# Altium PCB final_pcb.PcbDoc (part 1 of 2)
Units mm, origin at the board's own origin, x right, y up, seen from the top; angles counter-clockwise.
Board outline 94.61 x 73.28 mm, 4 copper layers (Top Layer, Mid Layer 1, Mid Layer 2, Bottom Layer), stack 1.57 mm thick; 50 components, 37 nets, 197 pads, 62 vias.
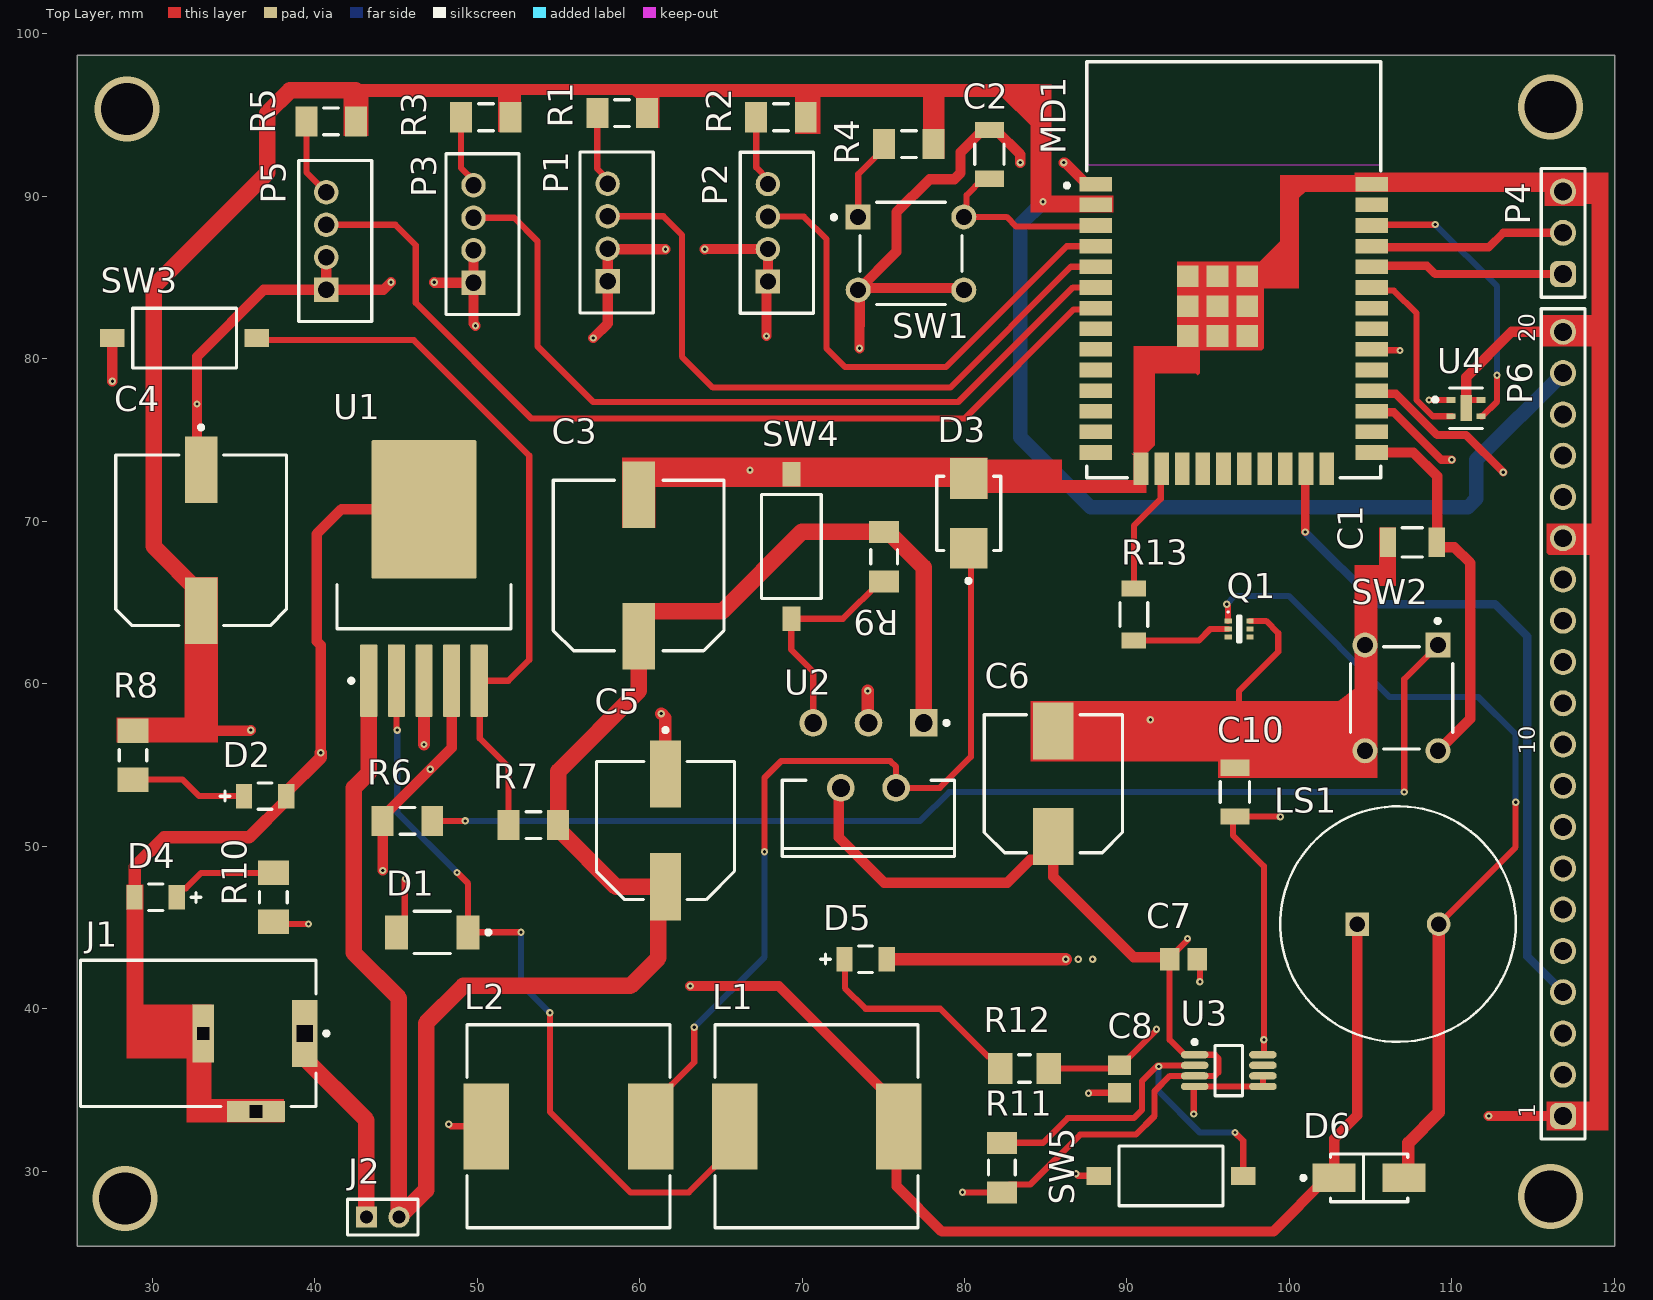
[diagram p0: Top Layer view]
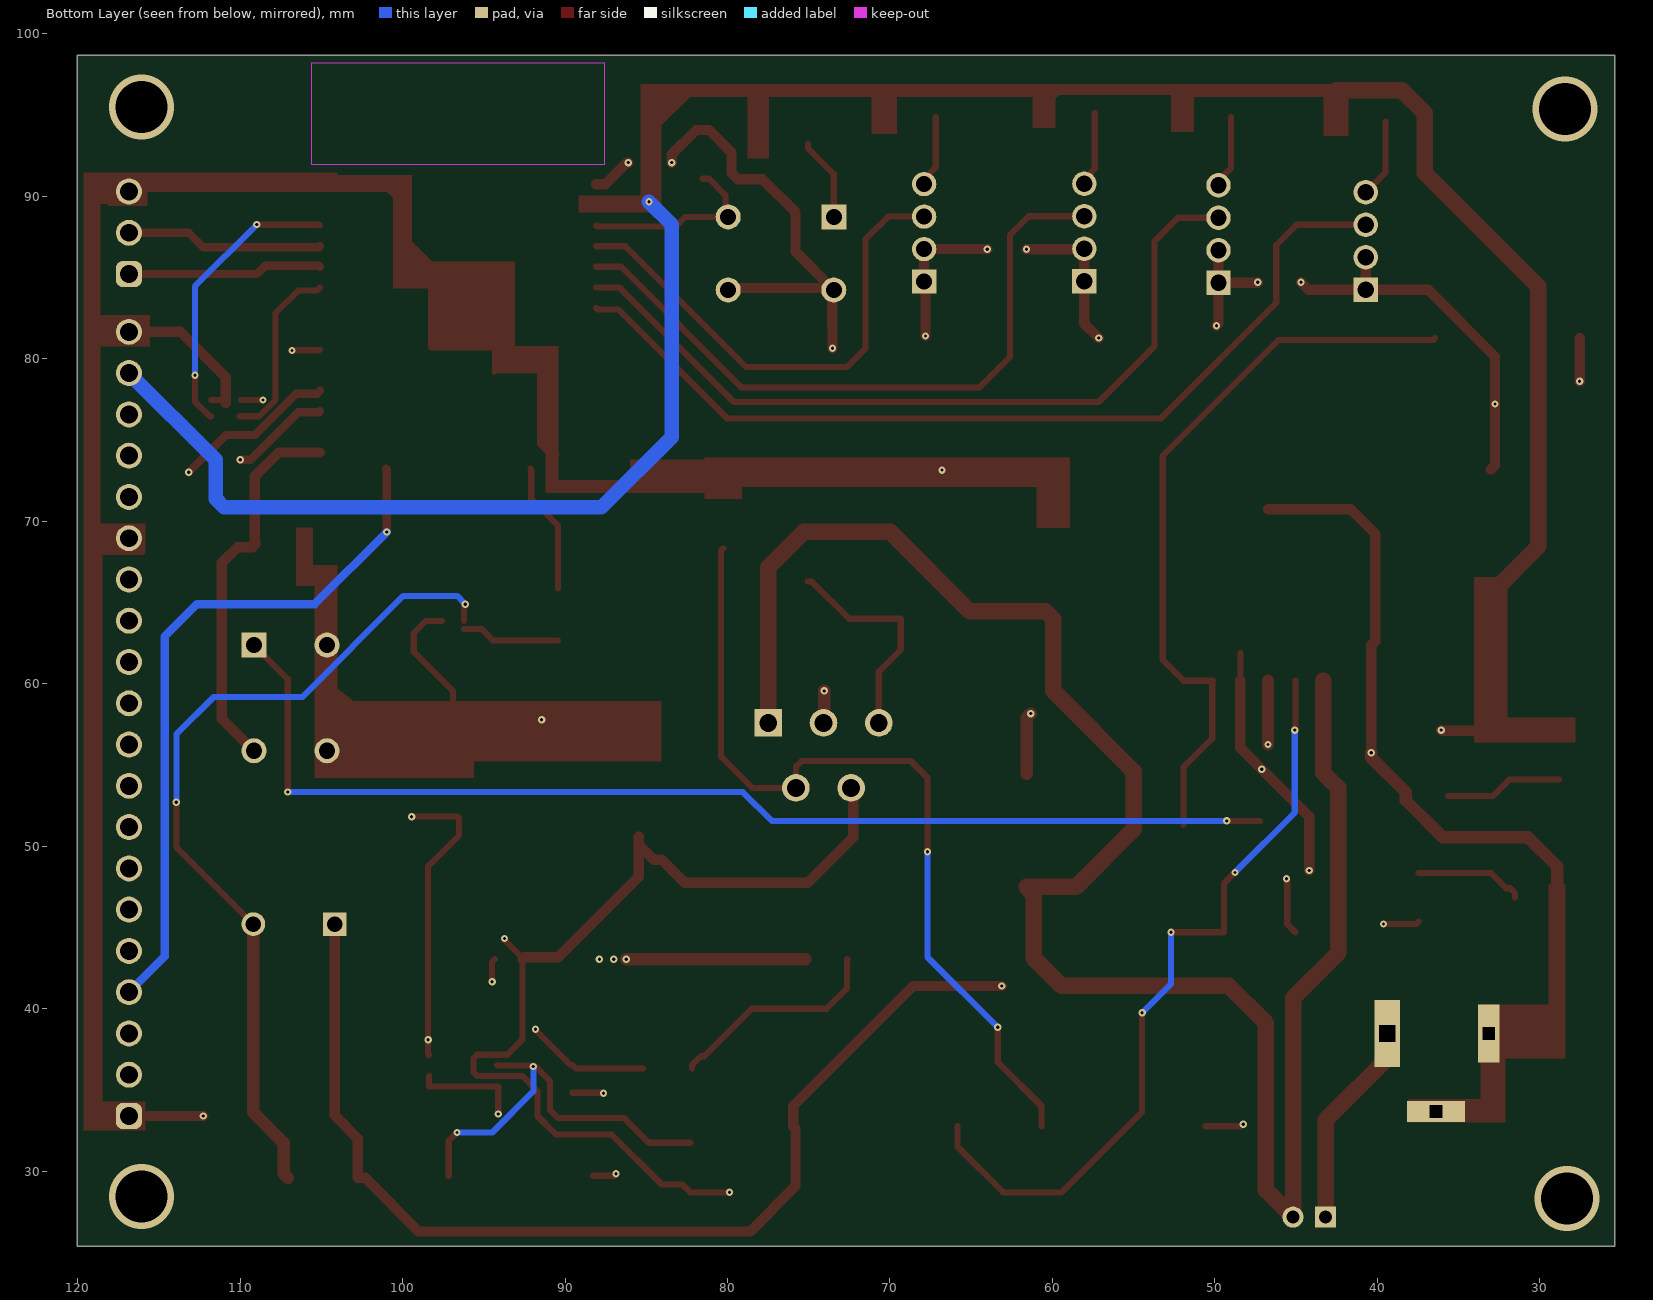
[diagram p1: Bottom Layer view, seen from below]
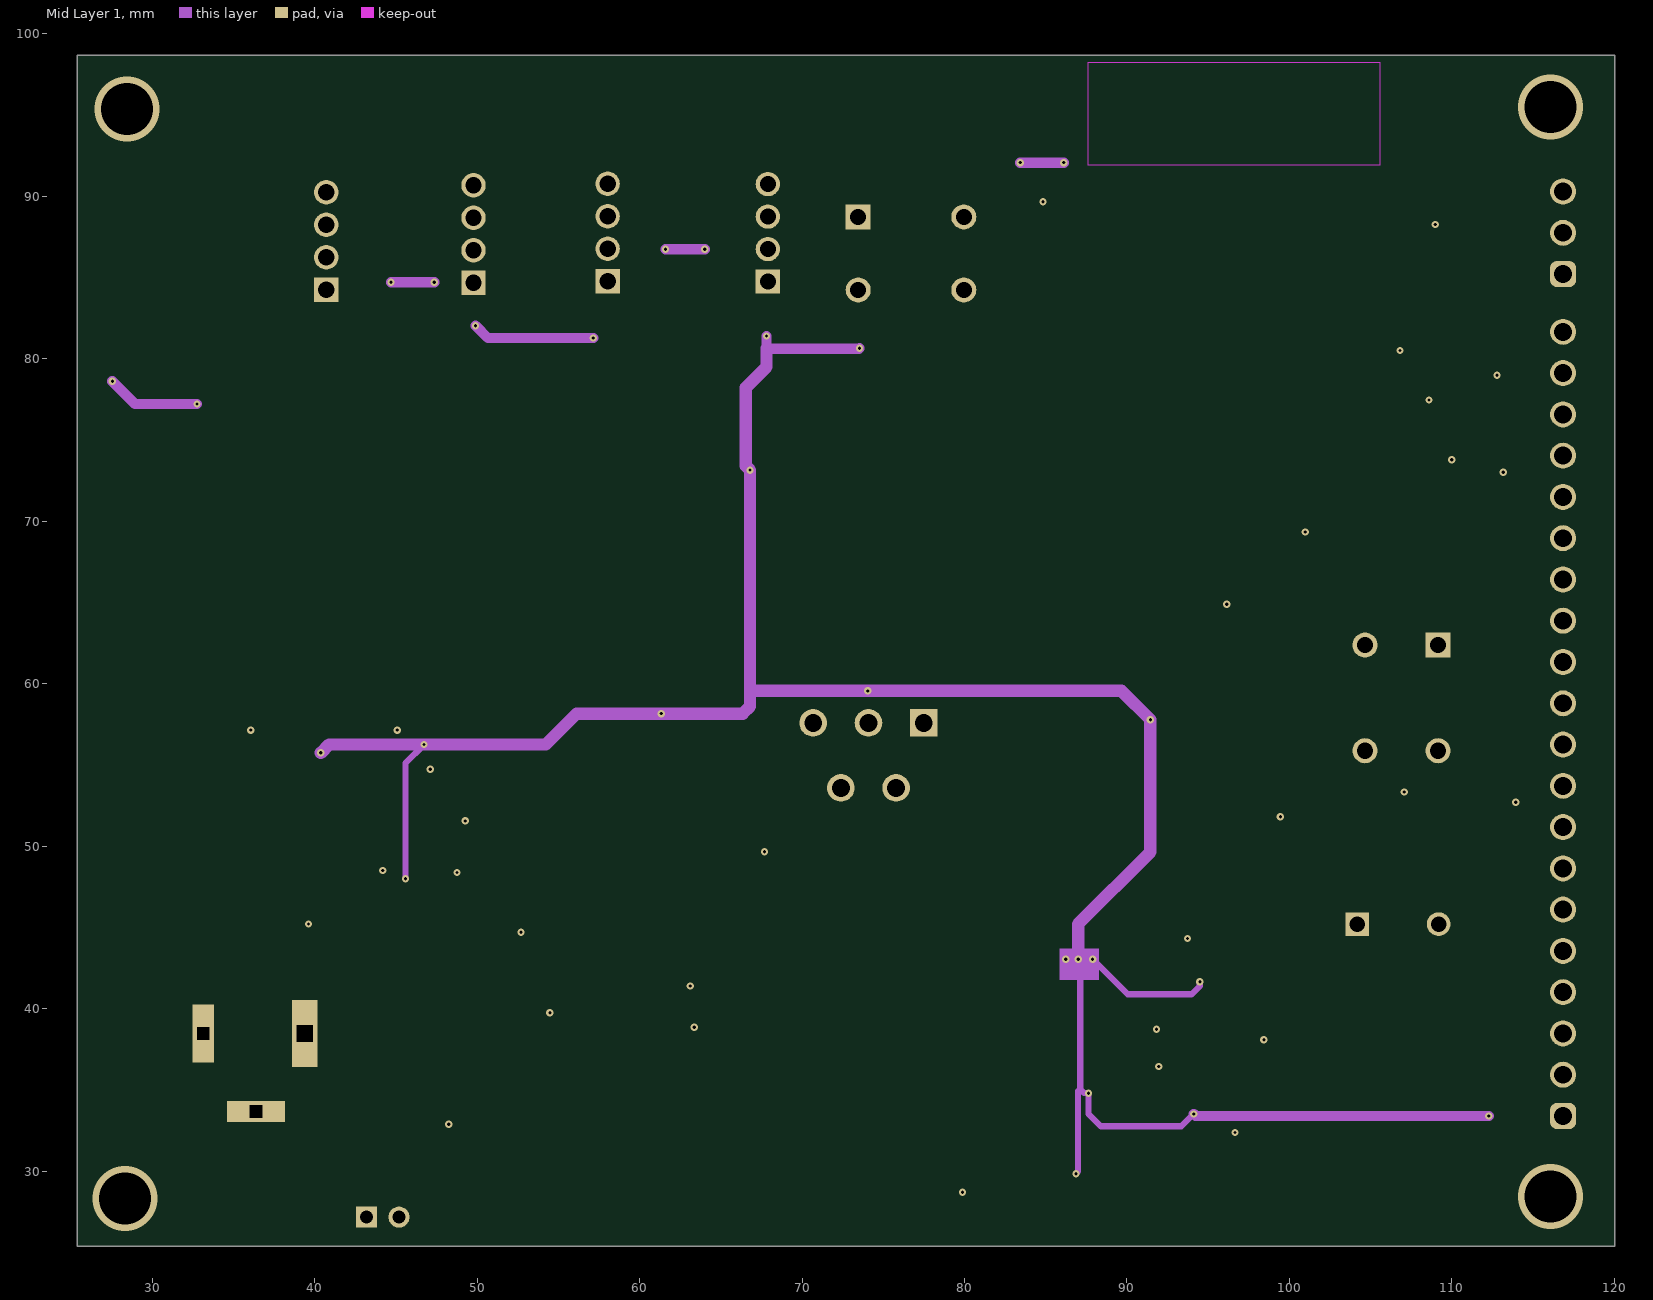
[diagram p2: Mid Layer 1]
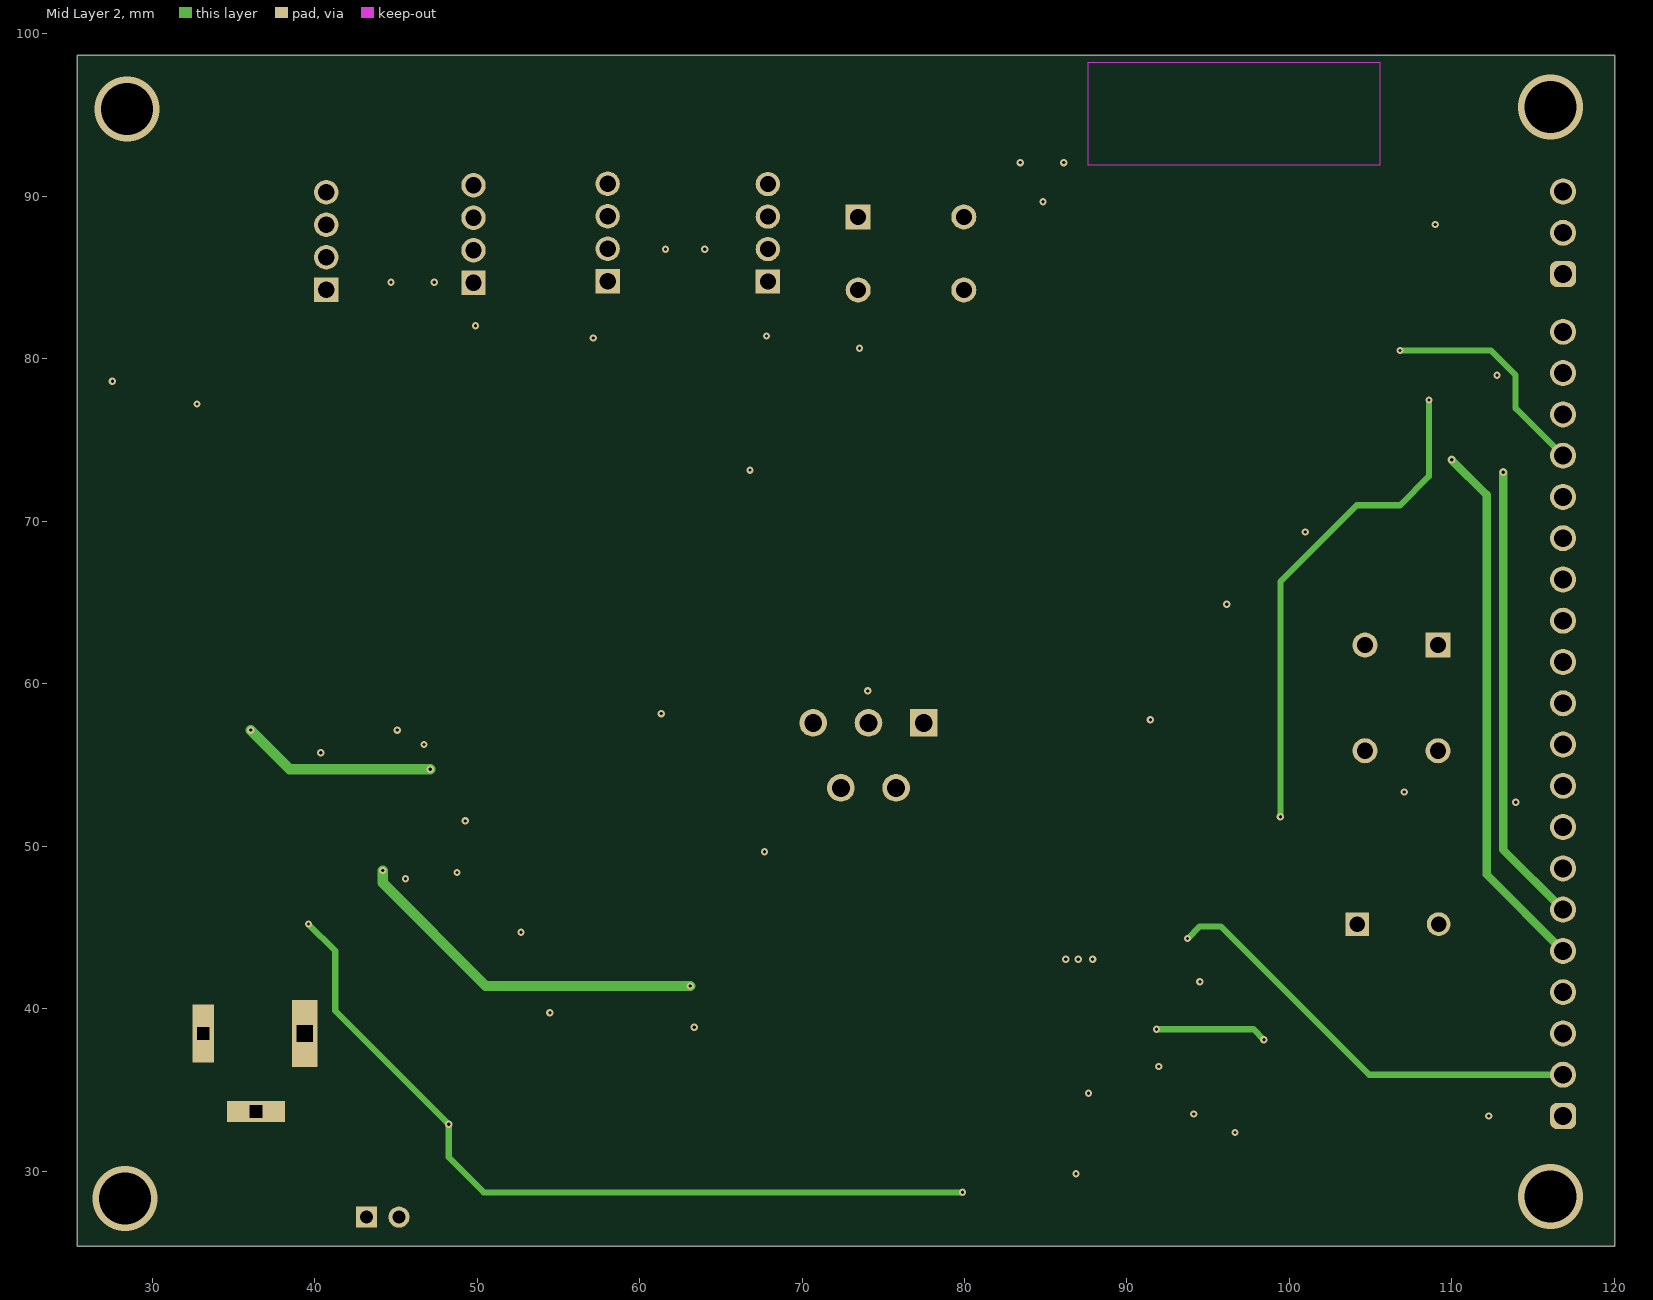
[diagram p3: Mid Layer 2]
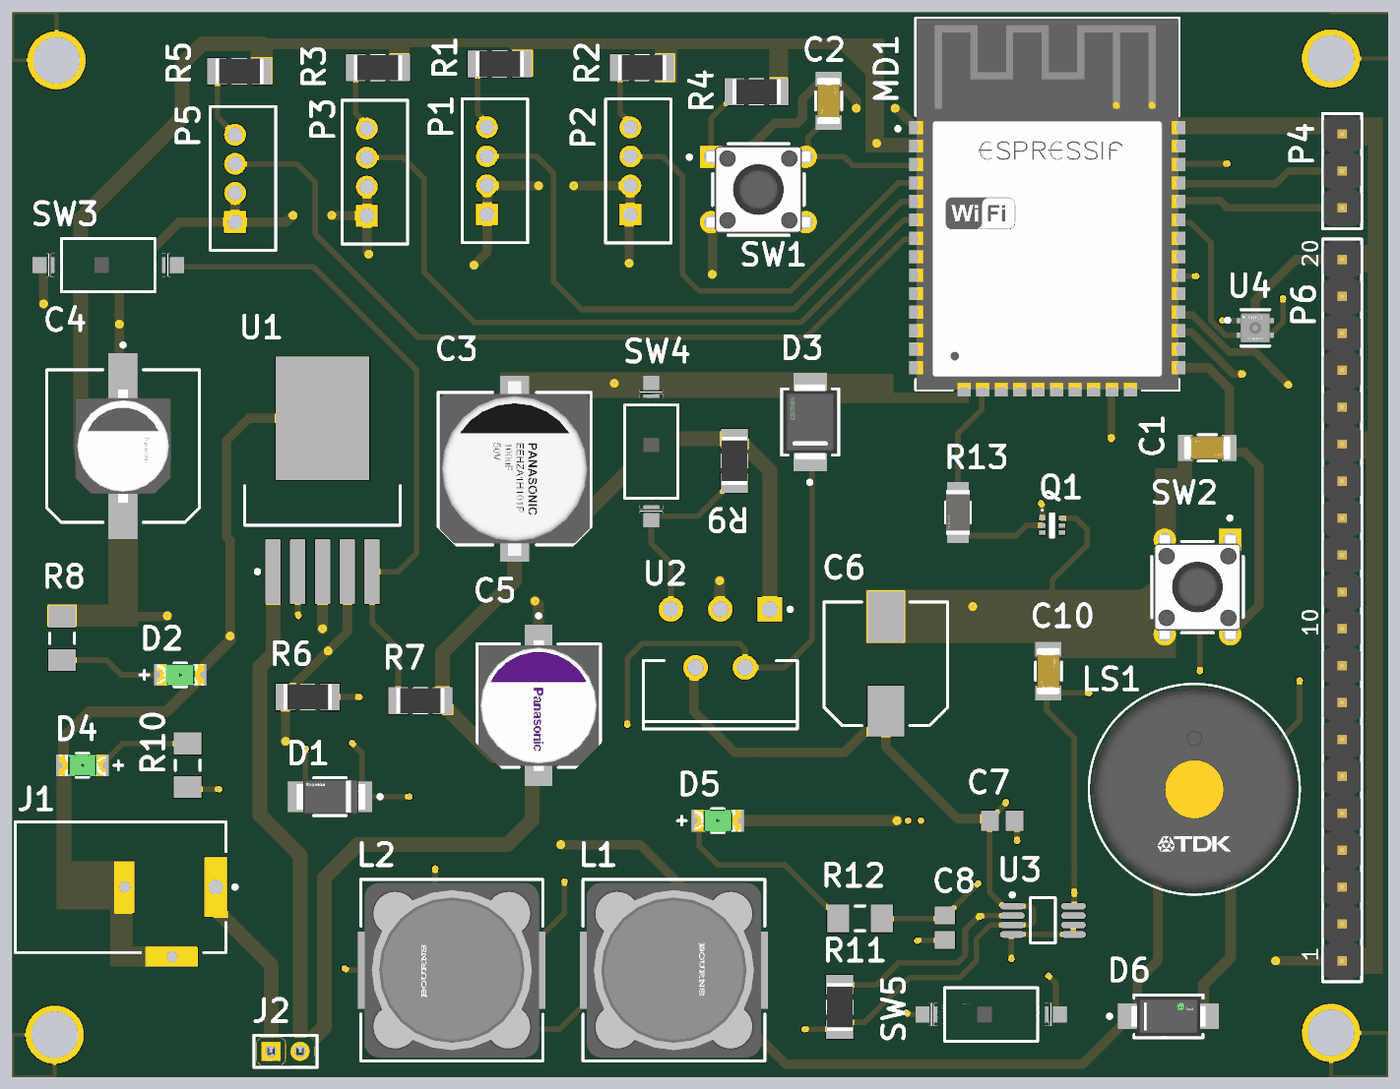
[diagram p4: 3D render of the assembled board from above, using the file's embedded part models]

## Layer stack, top to bottom
Top Solder: solder mask 0.0127, Solder Resist, Dk 3.8
Top Layer: signal copper 0.035
Dielectric 1: prepreg 0.1, 2313, Dk 4.05
Mid Layer 1: signal copper 0.0175
Core: core 1.265, FR-4, Dk 4.5
Mid Layer 2: signal copper 0.0175
Dielectric 2: prepreg 0.1, 2313, Dk 4.05
Bottom Layer: signal copper 0.035
Bottom Solder: solder mask 0.0127, Solder Resist, Dk 3.8

## Board outline
25.4,25.4 120.015,25.4 120.015,98.679 25.4,98.679

## Design rules (kind name [scope] priority, off if disabled: settings)
BoardOutlineClearance [All] p1: gap=0.2 ignorepadtopadclearanceinfootprint=FALSE
Clearance [All] p1: gap=0.102 ignorepadtopadclearanceinfootprint=FALSE except(0.127: Arc-Via Track-Via SMDPad-Via THPad-Via Via-Via Via-Fill Via-Poly Via-Region Via-Text; 0.25: Arc-Hole Track-Hole SMDPad-Hole THPad-Hole Via-Hole Fill-Hole Poly-Hole Region-Hole Text-Hole)
ComponentClearance [All] p1: gap=0.102 collisioncheckmode=3 verticalgap=0.102 showdistances=TRUE
DiffPairsRouting [All] p1: maxlimit=0.102 minlimit=0.102 mostfreqgap=0.102 toplayer_minwidth=0.102 toplayer_maxwidth=1816.048 toplayer_prefwidth=0.102 midlayer1_minwidth=0.102 midlayer1_maxwidth=1816.048 midlayer1_prefwidth=0.102 midlayer2_minwidth=0.102 midlayer2_maxwidth=1816.048 midlayer2_prefwidth=0.102 bottomlayer_minwidth=0.102 bottomlayer_maxwidth=1816.048 bottomlayer_prefwidth=0.102 maxuncoupledlength=12.7
Height [All] p1: minheight=0 maxheight=1816.048 prefheight=12.7
HoleSize [All] p1: absolutevalues=TRUE maxlimit=6.3 minlimit=0.2 maxpercent=80.000 minpercent=20.000
HoleToHoleClearance [All] p1: gap=0.25 allowstackedmicrovias=FALSE
MinimumAnnularRing [All] p1: minimumring=0.076
MinimumSolderMaskSliver [All] p1: minsoldermaskwidth=0
PlaneClearance [All] p1: clearance=0.102
PlaneConnect PlaneConnectPowerPads [InPadClass('PowerPads')] p1: planeconnectstyle=Direct reliefexpansion=0.508 reliefentries=4 reliefconductorwidth=0.254 reliefairgap=0.254
PlaneConnect [All] p2: pad.planeconnectstyle=Relief pad.reliefexpansion=0.3 pad.reliefentries=4 pad.reliefconductorwidth=0.102 pad.reliefairgap=0.102 via.planeconnectstyle=Direct via.reliefexpansion=0.3 via.reliefentries=4 via.reliefconductorwidth=0.127 via.reliefairgap=0.127
PolygonConnect PolygonConnectPowerPads [All vs (InPadClass('PowerPads'))] p1: connectstyle=Direct reliefconductorwidth=0.254 reliefentries=4 polygonreliefangle="90 Angle" airgapwidth=0.254
PolygonConnect [All] p2: thpad.connectstyle=Relief thpad.reliefconductorwidth=0.102 thpad.reliefentries=4 thpad.polygonreliefangle="90 Angle" thpad.airgapwidth=0.102 smdpad.connectstyle=Relief smdpad.reliefconductorwidth=0.102 smdpad.reliefentries=4 smdpad.polygonreliefangle="90 Angle" smdpad.airgapwidth=0.102 via.connectstyle=Direct via.reliefconductorwidth=0.127 via.reliefentries=4 via.polygonreliefangle="90 Angle" via.airgapwidth=0.127
RoutingVias [All] p1: holewidth=0.2 width=0.45 viastyle="Through Hole" minholewidth=0.2 minwidth=0.45 maxholewidth=6.3 maxwidth=6.55
SilkToSilkClearance [All] p1: silktosilkclearance=0
SilkToSolderMaskClearance [IsPad] p1: minsilkscreentomaskgap=0.102 clearancetoexposedcopper=TRUE
SolderMaskExpansion [All] p1: expansion=0.075 istentingtop=FALSE
Width [All] p1: maxlimit=1816.048 minlimit=0.102 preferedwidth=0.102
20 further rules are at their usual default settings.

## Classes and differential pairs
component class U_Sensors_Actuators: C10 D6 LS1 P6 Q1 R13 U4
component class U_powerSupply: C3 C4 C5 C6 C7 C8 D1 D2 D3 D4 D5 J1 J2 L1 L2 R7 R8 R9 R10 R11 R12 SW3 SW4 SW5 U1 U2 U3
component class U_microcontroller: C1 C2 MD1 P1 P2 P3 P4 P5 R1 R2 R3 R4 R5 R6 SW1 SW2

## Components (designator, comment, footprint, x,y, rotation, side; value= is the part's Value field where it differs from the comment)
C1 "CC1206KRX7R9BB104" FP-CC1206-1_25-MFG 107.569,68.707 r180 top value="100 nF"
C2 "CC1206KRX7R9BB104" FP-CC1206-1_25-MFG 81.534,92.583 r90 top value="100 nF"
C3 "EEHZA1H101P" FP-ZAG-MFG 59.944,67.278 r270 top value=470uF
C4 "EEEFK1V331AP" FP-FKG-MFG 33.02,68.834 r270 top
C5 "470uF" FP-OS-CON-SMT-E7-MFG 61.595,50.973 r270 top
C6 "220uF" NIC-CAPA2-8X10_V 85.471,53.848 r90 top
C7 "GRM21BF51C106ZE15L" CAPC2013X135X45NL10T25 93.472,43.053 r180 top
C8 "GRM21BF51C106ZE15L" CAPC2013X135X45NL10T25 89.535,35.687 r90 top
C10 "CC1206KRX7R9BB104" FP-CC1206-1_25-MFG 96.647,53.34 r90 top value="100 nF"
D1 "CMS06(TE12L,Q,M)" FP-M-FLAT-MFG 47.244,44.704 r0 top
D2 "SML-LX1206GC-TR" FP-SML-LX1206GC-TR-MFG 36.957,53.086 r0 top
D3 "B240-13-F" FP-SMB-MFG 80.264,70.485 r90 top value=200pF
D4 "SML-LX1206GC-TR" FP-SML-LX1206GC-TR-MFG 30.226,46.863 r180 top
D5 "SML-LX1206OW-TR" FP-SML-LX1206GC-TR-MFG 73.914,43.053 r0 top
D6 "RS1M" FP-403AE-MFG 104.902,29.591 r0 top value=10pF
J1 "RAPC722X" SWITCH-RAPC712X-3_V 36.272,38.481 r270 top
J2 "M22-2510205" FP-M22-2510205-MFG 44.196,27.178 r0 top
L1 "SRR1210-101M" FP-SRR1210-MFG 70.896,32.766 r0 top
L2 "SRR1210-680M" FP-SRR1210-MFG 55.626,32.766 r180 top value=68uH
LS1 "PS1440P02BT" FP-PS1440P02BT-MFG 106.68,45.212 r0 top
MD1 "ESP32-WROOM-32D" FP-ESP32-WROOM-32D-MFG 96.574,85.482 r0 top
P1 "B4B-PH-K-S(LF)(SN)" JST-B4B-PH-K-S_V 58.589,87.773 r90 top
P2 "B4B-PH-K-S(LF)(SN)" JST-B4B-PH-K-S_V 68.453,87.757 r90 top
P3 "B4B-PH-K-S(LF)(SN)" JST-B4B-PH-K-S_V 50.334,87.678 r90 top
P4 "Program Header" 61300311121 116.84,87.757 r90 top
P5 "B4B-PH-K-S(LF)(SN)" JST-B4B-PH-K-S_V 41.275,87.249 r90 top
P6 "61302011121" 61302011121 116.84,57.531 r90 top
Q1 "BC847CDXV6T1G" ONSC-SOT-563-6-463A-01_V 96.901,63.373 r0 top
R1 "CRCW12061K00FKEA" RESC3216X60X45ML15T20 58.928,95.123 r0 top
R2 "CRCW12061K00FKEA" RESC3216X60X45ML15T20 68.707,94.869 r0 top
R3 "CRCW12061K00FKEA" RESC3216X60X45ML15T20 50.547,94.869 r0 top
R4 "CRCW12061K00FKEA" RESC3216X60X45ML15T20 76.58,93.218 r0 top
R5 "CRCW12061K00FKEA" RESC3216X60X45ML15T20 41.021,94.615 r0 top
R6 "CRCW12061K00FKEA" RESC3216X60X45ML15T20 45.72,51.562 r180 top
R7 "CRCW12061K00FKEA" RESC3216X60X45ML15T20 53.468,51.308 r0 top
R8 "2K" RESC3216X70X50ML20T25 28.829,55.602 r90 top
R9 "CRCW12061K00FKEA" RESC3216X60X45ML15T20 75.057,67.818 r90 top
R10 "3K" RESC3216X70X50ML20T25 37.465,46.863 r270 top
R11 "CRCW12061K00FKEA" RESC3216X60X45ML15T20 82.296,30.226 r270 top
R12 "2K" RESC3216X70X50ML20T25 83.693,36.322 r0 top
R13 "AC1206JR-07220RL" FP-AC1206-MFG 90.424,64.262 r270 top value=220Ω
SW1 "3-1825910-1" FP-3-1825910-1-MFG 76.708,86.487 r0 top
SW2 "3-1825910-1" FP-3-1825910-1-MFG 106.898,59.13 r270 top
SW3 "A6S-1104-H" FP-A6S-1104-H-MFG 32.004,81.28 r90 top
SW4 "A6S-1104-H" FP-A6S-1104-H-MFG 69.342,68.453 r0 top
SW5 "A6S-1104-H" FP-A6S-1104-H-MFG 92.71,29.718 r90 top
U1 "LM2596S-3.3/NOPB" KTT0005B_M 46.736,66.489 r90 top
U2 "LM2596T-5/NOPB" NDH0005A 74.09,55.594 r180 top
U3 "LP2966IMM-1833/NOPB" MUA08A_N 96.266,36.195 r0 top
U4 "SHTC1" FP-SHTC1-MFG 110.871,76.962 r270 top

## Footprints (in the part's own frame and the unit in brackets; to place one, negate y for a bottom-side part, rotate by r counter-clockwise, add the part's x,y. Pads: shape width x height; smd on the part's side, far side on the other; paste and mask are expansions set on the pad)
61300311121 [mm] "Pin Header, pitch 2.54 mm, THT, Vertical, single row, 3p"
  rrect50% 1.6x1.6 hole 1.1: 1(-2.54,0)
  round 1.6 hole 1.1: 2(0,0) 3(2.54,0)
  silkscreen extent -3.96,-1.35 3.96,1.35, body extent -3.81,-1.27 3.81,1.27, height 8.57
61302011121 [mm] "Pin Header, pitch 2.54 mm, THT, Vertical, single row, 20p"
  rrect50% 1.6x1.6 hole 1.1: 1(-24.13,0)
  round 1.6 hole 1.1: 2(-21.59,0) 3(-19.05,0) 4(-16.51,0) 5(-13.97,0) 6(-11.43,0) 7(-8.89,0) 8(-6.35,0) 9(-3.81,0) 10(-1.27,0) 11(1.27,0) 12(3.81,0) 13(6.35,0) 14(8.89,0) 15(11.43,0) 16(13.97,0) 17(16.51,0) 18(19.05,0) 19(21.59,0) 20(24.13,0)
  silkscreen extent -25.55,-1.35 25.55,1.35, body extent -25.4,-1.27 25.4,1.27, height 8.57
CAPC2013X135X45NL10T25 [mm] "Chip Capacitor, 2-Leads, Body 2.00x1.25mm, IPC Medium Density"
  rect 1.2x1.4 smd: 1(-0.85,0) 2(0.85,0)
  body extent -1.05,-0.67 1.05,0.67, height 1.35
FP-3-1825910-1-MFG [mm]
  rect 1.54x1.54 hole 0.99 paste-2539.97 mask+0: 1(-3.25,2.25)
  round 1.54 hole 0.99 paste-2539.97 mask+0: 2(3.25,2.25) 3(-3.25,-2.25) 4(3.25,-2.25)
  silkscreen extent -4.87,-3.15 3.15,3.15, body extent -4.12,-3.24 4.12,3.24, height 0.25
FP-403AE-MFG [mm]
  rect 2.65x1.75 smd paste+0 mask+0: 1(-2.15,0) 2(2.15,0)
  silkscreen extent -4.17,-1.48 2.37,1.48, body extent -3.57,-1.58 3.57,1.58, height 0.25
FP-A6S-1104-H-MFG [mm]
  rect 1.1x1.5 smd paste+0 mask+0: 1(0,-4.45) 2(0,4.45)
  silkscreen extent -1.84,-3.2 1.84,3.2, body extent -1.94,-5.3 1.94,5.3, height 0.25
FP-AC1206-MFG [mm]
  rect 1x1.5 smd paste+0 mask+0: 1(-1.6,0) 2(1.6,0)
  silkscreen extent -0.72,-0.85 0.72,0.85, body extent -2.2,-0.95 2.2,0.95, height 0.25
FP-CC1206-1_25-MFG [mm]
  rect 1x1.8 smd paste+0 mask+0: 1(-1.5,0) 2(1.5,0)
  silkscreen extent -0.63,-0.9 0.63,0.9, body extent -2.2,-1.25 2.2,1.25, height 0.25
FP-ESP32-WROOM-32D-MFG [mm]
  rect 2x0.9 smd paste+0 mask+0: 1(-8.5,5.26) 2(-8.5,3.99) 3(-8.5,2.72) 4(-8.5,1.45) 5(-8.5,0.18) 6(-8.5,-1.09) 7(-8.5,-2.36) 8(-8.5,-3.63) 9(-8.5,-4.9) 10(-8.5,-6.17) 11(-8.5,-7.44) 12(-8.5,-8.71) 13(-8.5,-9.98) 14(-8.5,-11.25) 25(8.5,-11.25) 26(8.5,-9.98) 27(8.5,-8.71) 28(8.5,-7.44) 29(8.5,-6.17) 30(8.5,-4.9) 31(8.5,-3.63) 32(8.5,-2.36) 33(8.5,-1.09) 34(8.5,0.18) 35(8.5,1.45) 36(8.5,2.72) 37(8.5,3.99) 38(8.5,5.26)
  rect 0.9x2 smd paste+0 mask+0: 15(-5.715,-12.25) 16(-4.445,-12.25) 17(-3.175,-12.25) 18(-1.905,-12.25) 19(-0.635,-12.25) 20(0.635,-12.25) 21(1.905,-12.25) 22(3.175,-12.25) 23(4.445,-12.25) 24(5.715,-12.25)
  rect 1.33x1.33 smd paste+0 mask+0: 39(-2.835,-4.075) 39(-2.835,-2.24) 39(-2.835,-0.405) 39(-1,-4.075) 39(-1,-2.24) 39(-1,-0.405) 39(0.835,-4.075) 39(0.835,-2.24) 39(0.835,-0.405)
  Keep-Out Layer region: -9,6.45 9,6.45 9,12.75 -9,12.75
  Keep-Out Layer region: -9,6.45 9,6.45 9,12.75 -9,12.75
  silkscreen extent -10.4,-12.8 9.05,12.8, body extent -9.6,-13.35 9.6,12.9, height 0.25
FP-FKG-MFG [mm]
  rect 4.1x2 smd paste+0 mask+0: 1(-4.35,0) 2(4.35,0)
  silkscreen extent -7.07,-5.25 5.25,5.25, body extent -6.65,-5.5 6.65,5.5, height 0.25
FP-M22-2510205-MFG [mm]
  rect 1.3x1.3 hole 0.8 paste-2539.97 mask+0: 1(-1,0)
  round 1.3 hole 0.8 paste-2539.97 mask+0: 2(1,0)
  silkscreen extent -2.17,-1.1 2.17,1.1, body extent -2.27,-1.2 2.27,1.2, height 0.25
FP-M-FLAT-MFG [mm]
  rect 1.4x2.1 smd paste+0 mask+0: 1(-2.2,0) 2(2.2,0)
  silkscreen extent -1.12,-1.3 3.58,1.3, body extent -3,-1.4 3,1.4, height 0.25
FP-OS-CON-SMT-E7-MFG [mm]
  rect 4.15x1.9 smd paste+0 mask+0: 1(-3.475,0) 2(3.475,0)
  silkscreen extent -6.3,-4.25 4.25,4.25, body extent -5.8,-4.5 5.8,4.5, height 0.25
FP-PS1440P02BT-MFG [mm]
  rect 1.45x1.45 hole 0.95 paste-2539.97 mask+0: 1(-2.5,0)
  round 1.45 hole 0.95 paste-2539.97 mask+0: 2(2.5,0)
  silkscreen extent -7.25,-7.25 7.25,7.25, body extent -7.35,-7.35 7.35,7.35, height 0.25
FP-SHTC1-MFG [mm]
  rect 0.35x0.55 smd paste-1000 mask-1000: 1(-0.5,-0.925) 2(0.5,-0.925) 3(0.5,0.925) 4(-0.5,0.925)
  rect 1.6x0.7 smd paste-1000 mask+0: 5(0,0)
  silkscreen extent -1.25,-2.02 1.25,1, body extent -1.1,-1.4 1.1,1.4, height 0.25
FP-SMB-MFG [mm]
  rect 2.5x2.3 smd paste+0 mask+0: 1(-2.15,0) 2(2.15,0)
  silkscreen extent -4.27,-1.97 2.28,1.97, body extent -3.5,-2.07 3.5,2.07, height 0.25
FP-SML-LX1206GC-TR-MFG [mm]
  rect 1x1.5 smd paste+0 mask+0: 1(-1.3,0) 2(1.3,0)
  silkscreen extent -2.78,-0.81 0.43,0.81, body extent -1.9,-0.91 1.9,0.91, height 0.25
FP-SRR1210-MFG [mm]
  rect 2.8x5.3 smd paste+0 mask+0: 1(-5.05,0) 2(5.05,0)
  silkscreen extent -6.25,-6.25 6.25,6.25, body extent -6.55,-6.35 6.55,6.35, height 0.25
FP-ZAG-MFG [mm]
  rect 4.1x2 smd paste+0 mask+0: 1(-4.35,0) 2(4.35,0)
  silkscreen extent -5.25,-5.25 5.25,5.25, body extent -6.65,-5.5 6.65,5.5, height 0.25
JST-B4B-PH-K-S_V [mm] "Connector, 4-Leads, Body 9.9x4.5mm, Pitch 2mm"
  rect 1.5x1.5 hole 1: 1(-3,0.55)
  round 1.5 hole 1: 2(-1,0.55) 3(1,0.55) 4(3,0.55)
  silkscreen extent -4.95,-2.25 4.95,2.25, body extent -4.95,-2.25 4.95,2.25, height 6
KTT0005B_M [mm] "DPAK, 5-Leads, Body 10.65x9.65mm, Pitch 1.7mm, IPC Low Density"
  rrect10% 4.45x1.05 smd: 1(-6.3,3.4) 2(-6.3,1.7) 3(-6.3,0) 4(-6.3,-1.7) 5(-6.3,-3.4)
  rrect2% 8.5x6.45 smd: 6(4.25,0)
  silkscreen extent -6.42,-5.35 -0.4,5.35, body extent -3.1,-5.32 6.55,5.33, height 4.83
MUA08A_N [mm] "TSOP, 8-Leads, Body 3x3mm, Pitch 0.65mm, IPC Medium Density"
  oval 1.7x0.45 smd: 1(-2.1,0.975) 2(-2.1,0.325) 3(-2.1,-0.325) 4(-2.1,-0.975) 5(2.1,-0.975) 6(2.1,-0.325) 7(2.1,0.325) 8(2.1,0.975)
  silkscreen extent -2.22,-1.55 0.85,1.87, body extent -1.55,-1.55 1.55,1.55, height 1.09
NDH0005A [mm] "FM, 5-Leads, Body 10.6x4.7mm, Pitch 1.7mm"
  rect 1.7x1.7 hole 1.1: 1(-3.4,-2)
  round 1.7 hole 1.1: 2(-1.7,2) 3(0,-2) 4(1.7,2) 5(3.4,-2)
  silkscreen extent -5.3,-2.12 5.3,6.23, body extent -5.35,-2.31 5.35,6.28, height 21.1
NIC-CAPA2-8X10_V [mm] "Aluminum Electrolytic Capacitor, Diameter 8mm, Height 10.8mm, Pitch 6.5mm"
  rect 3.5x2.5 smd: 1(-3.25,0) 2(3.25,0)
  silkscreen extent -4.25,-4.25 4.25,4.25, body extent -3.99,-3.97 3.99,4, height 10.8
ONSC-SOT-563-6-463A-01_V [mm] "SOT23, 6-Leads, Body 1.6x1.2mm, Pitch 0.5mm"
  rect 0.45x0.3 smd: 1(-0.675,0.5) 2(-0.675,0) 3(-0.675,-0.5) 4(0.675,-0.5) 5(0.675,0) 6(0.675,0.5)
  silkscreen extent -0.72,-0.8 0.1,1.1, body extent -0.6,-0.8 0.6,0.8, height 0.6
RESC3216X60X45ML15T20 [mm] "Chip Resistor, 2-Leads, Body 3.3x1.75mm, IPC Low Density"
  rect 1.35x1.85 smd: 1(-1.525,0) 2(1.525,0)
  silkscreen extent -0.45,-0.82 0.45,0.82, body extent -1.65,-0.87 1.65,0.87, height 0.6
RESC3216X70X50ML20T25 [mm] "Chip Resistor, 2-Leads, Body 3.20x1.60mm, IPC Low Density"
  rect 1.5x1.9 smd: 1(-1.5,0) 2(1.5,0)
  silkscreen extent -0.35,-0.85 0.35,0.85, body extent -1.7,-0.9 1.7,0.9, height 0.7
SWITCH-RAPC712X-3_V [mm] "CONN, 3-Leads, Body 14.5x9mm"
  rect 4.1x1.55 hole 1.01 square: 1(0,3.125)
  rect 3.55x1.3 hole 0.76 square: 2(0,-3.125)
  rect 1.3x3.55 hole 0.76 square: 3(4.8,0.125)
  silkscreen extent -4.5,-10.68 4.5,4.58, body extent -4.5,-10.68 4.5,3.83, height 11

## Part data
C1 C2 C10: library part CMP-03422-000842-1, "CAP CER 0.1UF 50V X7R 1206", Capacitance="100 nF", Manufacturer=Yageo, Package=CC1206-1.25, Temperature="-55°C to +125°C", Temperature Characteristic=X7R, Temperature Coefficient=15%, Temperature Range High=+125°C, Temperature Range Low=-55°C, Tolerance=0.1, Voltage Rating="50 V", Automotive=No, Automotive Grade=NA, Category=Cap, ComponentLink2Description=Datasheet, ComponentLink2URL=http://www.yageo.com/documents/recent/UPY-NP0X7R_HV_1KV-to-3KV_11.pdf, Device Class L1="Passive Components", Device Class L2=Capacitors, Device Class L3="Ceramic Capacitors", Digikey Description="CAP CER 0.1UF 50V X7R 1206", Footprint Url=http://www.yageo.com/exep/pages/download/literatures/UPY-C_GEN_24.pdf, Height=1.45mm, Lead Free=Yes, Manufacturer Part Number=CC1206KRX7R9BB104, Material=Ceramic, Mouser Description="Multilayer Ceramic Capacitors MLCC - SMD/SMT 100nF 50V X7R 10%", Octopart=https://octopart.com/cc1206krx7r9bb104-yageo-39467816, RoHS=TRUE
C3: library part CMP-2000-06221-2, "CAP ALUM POLY HYB 100UF 50V SMD", Capacitance=100uF, Leakage Current=50uA, Manufacturer=Panasonic, Package=ZAG, Ripple Current=2000mA, Temperature="-55°C to +105°C", Temperature Range High=+105°C, Temperature Range Low=-55°C, Tolerance=20%, Voltage=50V, Automotive=Yes, Automotive Grade="Grade 2", Category=Cap, ComponentLink2Description=Datasheet, ComponentLink2URL=https://industrial.panasonic.com/cdbs/www-data/pdf/RDD0000/ABA0000C1221.pdf, Device Class L1="Passive Components", Device Class L2=Capacitors, Device Class L3="Polymer Capacitors", Digikey Description="CAP ALUM POLY HYB 100UF 50V SMD", Dissipation Factor=10%, Esr=28mΩ, Footprint Url=https://industrial.panasonic.com/cdbs/www-data/pdf/RDD0000/DMD0000COL4.pdf, Height=10.5mm, Lead Free=Yes, Life=10000Hours, Manufacturer Part Number=EEHZA1H101P, Material="Conductive Polymer", Mounting Type="Surface Mount", Mouser Description="Cap Aluminum Polymer Hybrid 100uF 50VDC 20% (10 X 10.2mm) SMD 0.028 Ohm 2000mA 10000h 105C Embossed T/R", Octopart=https://octopart.com/eeh-za1h101p-panasonic-22287466, RoHS=TRUE, Voltage Rating=50V
C4: library part CMP-05427-002115-1, "CAP ALUM 330UF 20% 35V SMD", Capacitance=330uF, Case/Package=Radial, Dielectric Material=Aluminium, ESR (Equivalent Series Resistance)=80mR, Leakage Current=115.5uA, Max Operating Temperature=105°C, Min Operating Temperature=-55°C, Package Quantity=500, Ratings=AEC-Q200, Ripple Current=850mA, Tolerance=20%, Voltage=35V, Construction=Cylindrical, Contact Plating=Tin, Diameter=10mm, Height=10.2mm, Height - Seated (Max)=0.402inch, Impedance=80mR, Lead Free="Lead Free", Lead Length=3.5mm, Lead Pitch=4.6mm, Length=10.2mm, Life (Hours)=2000Hour, Mount="Surface Mount", Number of Pins=2, Packaging="Tape and Reel", Radiation Hardening=No, Reach SVHC Compliant=Yes, Ripple Current (AC)=850mA, RoHS Compliant=Yes, Series=FK, Termination=SMD/SMT, Voltage Rating=35V, Voltage Rating (DC)=35V, Width=10.3mm
C5: library part CMP-05428-000915-1, "Conductive Polymer Aluminum Solid Capacitors (OS-CON) 100uF ±20% 25V RADIAL SMT 8x6.9mm", Capacitance=100uF, Case/Package=Radial, ESR (Equivalent Series Resistance)=24mR, Leakage Current=500uA, Max Operating Temperature=105°C, Min Operating Temperature=-55°C, Package Quantity=1000, Ripple Current=3.2A, Tolerance=20%, Voltage=25V, Diameter=8mm, Dissipation Factor=12%, Height=6.9mm, Height - Seated (Max)=0.276inch, Lead Free="Lead Free", Length=6.9mm, Life (Hours)=5000Hour, Mount="Surface Mount", Number of Pins=7, Packaging="Tape and Reel", REACH SVHC="No SVHC", Ripple Current (AC)=3.2A, RoHS Compliant=Yes, Series="OS-CON, SVPF", Termination=SMD/SMT, Voltage Rating=25V, Voltage Rating (DC)=25V
C6: library part CMP-0687-00080-1, "Aluminum Electrolytic Capacitor, UD Series, Low Impedance, 220 uF, 35 V, + / - 20%, -55 to 105 degC, Chip Type, 8 x 10 mm D x L, Pb-Free, Reel", Manufacturer=Nichicon, PartNumber=UUD1V221MNL1GS, Rated Capacitance="220 uF", Rated Ripple Current (at 100kHz)="450 mA", Rated Voltage="35 V", Tolerance Rated Capacitance="-20 to 20%", ComponentLink1Description="Manufacturer URL", ComponentLink1URL=http://www.nichicon.co.jp/, ComponentLink2Description=Datasheet, ComponentLink2URL=http://products.nichicon.co.jp/en/pdf/XJA043/e-ud.pdf, ComponentLink3Description="Package Specification", ComponentLink3URL=http://products.nichicon.co.jp/en/pdf/XJA043/e-ud.pdf, DatasheetVersion=08/2012, Diameter="8 mm", Endurance Time="5000 h", Impedance="0.17 Ohm", Length="10 mm", Mounting Technology="Surface Mount", PackageDescription="2-Pin Surface Mount Device, Diameter 8 mm, Height 10 mm, Pitch 6.5 mm", PackageReference=CAPAE-D8H10, Packing="Dia382mm Reel", RoHS=TRUE
C7 C8: library part CMP-2007-03514-1, Manufacturer=Murata, Part Number=GRM21BF51C106ZE15L
D1: library part CMP-2000-06115-2, "DIODE SCHOTTKY 30V 2A MFLAT", Average Rectified Current=2A, Forward Voltage=370mV, Max Operating Temperature=125°C, Max Repetitive Reverse Voltage (Vrrm)=30V, Max Reverse Leakage Current=3mA, Max Surge Current=40A, Min Operating Temperature=-40°C, Package Quantity=1, Contact Plating=Tin, Element Configuration=Single, Forward Current=2A, Max Reverse Voltage (DC)=30V, Mount="Surface Mount", Number of Pins=2, Packaging="Tape and Reel", Peak Non-Repetitive Surge Current=40A, Peak Reverse Current=3mA, Radiation Hardening=No
D2 D4 D5: library part CMP-2000-07122-2, "LED GREEN CLEAR 1206 SMD", Case Code (Imperial)=1206, Case Code (Metric)=3216, Color=Green, Current Rating=25mA, Forward Current=20mA, Forward Voltage=2.2V, Lens Color=Colorless, Max Operating Temperature=85°C, Min Operating Temperature=-40°C, Package Quantity=1, Power Rating=65mW, Approvals=UL, Case/Package=1206, Dominant Wavelength=565nm, Height=1.1mm, Illumination Color=Green, Lead Free="Lead Free", Length=3.2mm, Lens Style=Rectangular, Lens Transparency=Clear, Luminous Intensity=10mcd, Mount="Surface Mount", Number of LEDs=1, Number of Pins=2, Packaging="Tape and Reel", REACH SVHC="No SVHC", RoHS Compliant=Yes, Test Current=20mA, Viewing Angle=160°, Wavelength=565nm, Width=1.6mm
D3: library part CMP-12790-000044-1, "DIODE SCHOTTKY 40V 2A SMB", Capacitance=200pF, Forward Current=2A, Manufacturer="Diodes Inc.", Max Junction Temp=+150°C, Max Repetitive Reverse Voltage=40V, Max Surge Forward Current=50A, Package=SMB, Peak Reverse Current=0.5mA, Temperature="-65°C to +150°C", Temperature Range Low=-65°C, Automotive=No, Category=Diode, ComponentLink2Description=Datasheet, ComponentLink2URL=https://www.diodes.com/assets/Datasheets/ds13004.pdf, Device Class L1="Discrete Semiconductors", Device Class L2=Diodes, Device Class L3="Schottky Diodes", Digikey Description="DIODE SCHOTTKY 40V 2A SMB", Footprint Url=https://www.diodes.com/assets/Package-Files/SMB.pdf, Height=2.5mm, Lead Free=Yes, Manufacturer Part Number=B240-13-F, Mouser Description="Schottky Diodes & Rectifiers 40V 2A", Octopart=https://octopart.com/b240-13-f-diodes+inc.-325780, Reverse Voltage=40V, RoHS=TRUE, Standoff Height=0.05mm, Temperature Range High=+150°C
D6: library part CMP-07163-000022-1, "DIODE GEN PURP 1KV 1A SMA", Capacitance=10pF, Forward Current=1A, Manufacturer="ON Semiconductor", Max Junction Temp=+150°C, Max Repetitive Reverse Voltage=1000V, Max Surge Forward Current=30A, Package=403AE, Peak Reverse Current=5uA, Temperature="-55°C to +150°C", Temperature Range Low=-55°C, Automotive=No, Category=Diode, ComponentLink2Description=Datasheet, ComponentLink2URL=https://www.onsemi.com/pub/Collateral/RS1M-D.PDF, Device Class L1="Discrete Semiconductors", Device Class L2=Diodes, Device Class L3="Rectifier Diodes", Digikey Description="DIODE GEN PURP 1KV 1A SMA", Footprint Url=https://www.onsemi.com/pub/Collateral/403AE.PDF, Height=2.5mm, Lead Free=Yes, Manufacturer Part Number=RS1M, Mouser Description="On a Reel of 7500, ON Semi 1000V 1A, Diode, 2-Pin DO-214AC RS1M", Octopart=https://octopart.com/rs1m-on+semiconductor-84331238, RoHS=TRUE, Standoff Height=0.05mm, Temperature Range High=+150°C
J1: library part CMP-2000-05384-1, "Power Jack, 5 A, 3-Pin THD, RoHS, Bulk", Color=Black, Current Rating=5A, Manufacturer=Switchcraft, Standard Package=2,500, Catalog Drawings="RAPC7(1,2)2XSide /  / RAPC7(1,2)2XTop", Category=Connectors,Interconnects, Connector Type=Jack, Contact Material=Brass, Contact Material - Plating=Nickel, Datasheet URL=http://www.mouser.com/ds/2/393/rapc722x_cd-371352.pdf, Datasheet Version="Rev. A, 08/2005", Dynamic Catalog=SwitchcraftInc, Family=Barrel-PowerConnectors, Gender=Male, Housing Color=Black, Housing Material=Thermoplastic, Internal Switch(s)=SingleSwitch,NormallyClosed, Manufacturer URL=http://www.switchcraft.com/, Mating Products="S765-ND / -CONNPLUGMINIPWR2CONDWHT/RED / S760K-ND / -CONNPOWERPLUGMINI.08\"BLACK / SC1052-ND / -CONNPOWERPLUGMINIBLACK", Mounting Type=ThroughHole,RightAngle, Number of Positions/Contacts=2Conductors,2Contacts, Other Names="Q2287470A / RAPC722X-ND / SC1313", Plug/Mating Plug Diameter=2.1mmID,5.5mmOD, RoHS Information=SwitchcraftRoHSInfo, Shielding=Unshielded, Termination=SolderEyelet(s)
J2: library part CMP-15831-000005-1, "CONN HEADER VERT 2POS 2MM", Current Rating=2A, Manufacturer=Harwin, Package=0, Temperature="-40°C to +105°C", Temperature Range High=+105°C, Temperature Range Low=-40°C, Automotive=No, Category=Conn, ComponentLink2Description=Datasheet, ComponentLink2URL=https://cdn.harwin.com/pdfs/C018XX_M22_Series_Connectors.pdf, Conn Gender=Male, Conn Orientation=Vertical, Contact Material=Gold,Nickel, Device Class L1=Connectors, Device Class L2="Headers and Wire Housings", Device Class L3=unset, Digikey Description="CONN HEADER VERT 2POS 2MM", Footprint Url=https://cdn.harwin.com/pdfs/M22-251.pdf, Height=5.45mm, Lead Free=Yes, Manufacturer Part Number=M22-2510205, Mouser Description="Headers & Wire Housings 2 PIN SIL VERTICAL GOLD PIN HEADER", Number Of Contacts=2, Number Of Rows=1, Octopart=https://octopart.com/m22-2510205-harwin-2538221, Pitch=2mm, RoHS=TRUE
L1: library part CMP-07248-000065-1, "FIXED IND 100UH 2.5A 135MOHM SMD", Case/Package=1210, Current Rating=2.5A, DC Resistance (DCR)=135mR, Inductance=100uH, Inductance Tolerance=20%, Max Operating Temperature=125°C, Min Operating Temperature=-40°C, Package Quantity=1, Resistor Type=Wirewound, Saturation Current=2.2A, Self Resonant Frequency=3MHz, Test Frequency=100kHz, Core Material=Ferrite, DC Current=2.5A, Depth=12.5mm, Height=10mm, Height - Seated (Max)=0.394inch, Length=12mm, Max DC Current=2.5A, Military Standard=Not, Mount="Surface Mount", Packaging="Tape and Reel", Q Factor=16, REACH SVHC="No SVHC", RMS Current (Irms)=2.5A, RoHS Compliant=Yes, Series=SRR1210, Shielding=Shielded, Termination=SMD/SMT, Tolerance=20%, Width=0.472inch
L2: library part CMP-07248-000002-1, "FIXED IND 68UH 3A 102 MOHM SMD", Inductance=68uH, Manufacturer=Bourns, Package=SRR1210, Rms Current=3A, Saturation Current=2.7A, Self Resonant Frequency=3.8MHz, Series Resistance=102mΩ, Temperature="-40°C to +125°C", Temperature Range High=+125°C, Temperature Range Low=-40°C, Test Frequency=2.52MHz, Tolerance=20%, Automotive=No, Category=Ind, ComponentLink2Description=Datasheet, ComponentLink2URL=https://www.bourns.com/docs/Product-Datasheets/SRR1210.pdf, Composition=Wirewound, Core Material=Ferrite, Device Class L1="Passive Components", Device Class L2=Inductors, Device Class L3="Fixed Inductors", Digikey Description="FIXED IND 68UH 3A 102 MOHM SMD", Height=10mm, Lead Free=Yes, Manufacturer Part Number=SRR1210-680M, Mouser Description="Fixed Inductors 68uH 20% SMD 1210", Octopart=https://octopart.com/srr1210-680m-bourns-10487145, Q Factor=12, RoHS=TRUE, Shielding=true
LS1: library part CMP-08413-000003-1, "AUDIO PIEZO TRANSDUCER 30V TH", Frequency=4kHz, Max Operating Temperature=70°C, Min Operating Temperature=-10°C, Operating Supply Voltage=3V, Package Quantity=350, Diameter=14mm, Height=8mm, Lead Free="Lead Free", Mount="Through Hole", Number of Terminals/Pins=2, Packaging="Tape and Reel", RoHS Compliant=Yes, Self Resonant Frequency=4kHz, Termination="PC Pins", Voltage Rating (DC)=3V, Washable=No
MD1: library part CMP-194065-000003-1, "WIFI MODULE 32MBITS SPI FLASH", Manufacturer="Espressif Systems", Max Frequency=2484MHz, Max Supply Voltage=3.6V, Min Supply Voltage=3V, Nominal Supply Current=500mA, Temperature="-40°C to +85°C", Temperature Range High=+85°C, Temperature Range Low=-40°C, Automotive=No, Bandwidth=72MHz, Category=UNK, ComponentLink2Description=Datasheet, ComponentLink2URL=https://www.espressif.com/sites/default/files/documentation/esp32-wroom-32d_esp32-wroom-32u_datasheet_en.pdf, Data Rate=150Mbits/s, Device Class L1="Integrated Circuits (ICs)", Device Class L2="RF Semiconductors and Devices", Device Class L3=Transceivers, Digikey Description="WIFI MODULE 32MBITS SPI FLASH", Height=3.2mm, Interface=I2C,SPI,UART,Ethernet,I2S,Other, Lead Free=Yes, Manufacturer Part Number=ESP32-WROOM-32D, Mouser Description="Wi-Fi/BT BLE Module ESP32-D0WD, SPI Flash, UART, P", Number Of Adc Channels=16, Number Of Gpio=32, Octopart=https://octopart.com/esp32-wroom-32d-espressif+systems-91040050, Package=ESP32-WROOM-32D, RoHS=TRUE, Sensitivity=-98dBm
P1 P2 P3 P5: library part CMP-2000-05165-1, "Male Header, Pitch 2 mm, 1 x 4 Position, Height 6 mm, Tail Length 3.4 mm, -25 to 85 degC, RoHS, Bulk", Manufacturer=JST, Datasheet URL=http://datasheet.octopart.com/B4B-PH-K-S%28LF%29%28SN%29-JST-datasheet-10558886.pdf, Datasheet Version=Apr-09, Manufacturer URL=http://www.jst.com/home2.html, No of Positions=4, Pitch=2mm, Style/Orientation=StraightHeader/Plug, Termination=Crimp, Type=ShroudedHeader
P4: library part CMP-1502-01062-2, Color=Black, Contact Resistance=20mΩ, Current Rating=3A, Max Operating Temperature=105°C, Min Operating Temperature=-40°C, Operating Supply Voltage=250V, Connector Type="Male Pin", Contact Material=Copper, Contact Mating Length=5.9944mm, Contact Plating=Gold, Gender=Male, Height=8.94mm, Lead Free="Lead Free", Lead Pitch=2.54mm, Mount="Through Hole", NexarPartId=32855521, Number Of Contacts=3, Number of Pins=3, Number of Positions=3, Number Of Rows=1, Orientation=Vertical, Packaging=Bulk, Pitch=2.54mm, REACH SVHC=Unknown, RoHS=Compliant, Termination=Solder, Voltage Rating=250V
P6: library part CMP-1502-01102-2, Color=Black, Contact Resistance=20mΩ, Current Rating=3A, Operating Supply Voltage=250V, Connector Type="Male Pin", Contact Material=Copper, Contact Mating Length=5.9944mm, Contact Plating=Gold, Gender=Male, Lead Pitch=2.54mm, Mount="Through Hole", NexarPartId=32855554, Number Of Contacts=20, Number of Pins=20, Number of Positions=20, Number Of Rows=1, Orientation=Vertical, Packaging=Bulk, Pitch=2.54mm, REACH SVHC=Unknown, RoHS=Compliant, Termination=Solder
Q1: library part CMP-1048-00902-1, "Dual General Purpose Transistors, NPN, 6-Pin SOT-563, Pb-Free, Tape and Reel", Manufacturer="On Semiconductor", ComponentLink1Description="Manufacturer URL", ComponentLink1URL=http://www.onsemi.com/, ComponentLink2Description=Datasheet, ComponentLink2URL=http://www.onsemi.cn/pub_link/Collateral/BC847CDXV6T1-D.PDF, ComponentLink3Description="Package Specification", ComponentLink3URL=http://www.onsemi.cn/pub_link/Collateral/463A-01.PDF, DatasheetVersion="Rev. 4", fT Min (MHz)=100, IC Continuous (A)=0.1, Mounting Technology="Surface Mount", PackageDescription="6-Pin Small Outline Transistor, Body 1.6 x 1.2 mm, Pitch 0.5 mm", PackageReference=SOT-563-6-463A-01, PackageVersion="Rev. F, 04/2005", Packing="Tape and Reel", PartNumber=BC847CDXV6T1G, Polarity="Dual NPN", RoHS=TRUE
R1 R2 R3 R4 R5 R6 R7 R9 R11: library part CMP-2100-03616-1, "Chip Resistor, 1 KOhm, +/- 1%, 0.25 W, -55 to 155 degC, 1206 (3216 Metric), RoHS, Tape and Reel", Case Code (Imperial)=1206, Case Code (Metric)=3216, Manufacturer="Vishay Semiconductor", Max Operating Temperature=155degC, Max Power Dissipation=250mW, Min Operating Temperature=-55degC, Package Description="2-Pin Surface Mount Device, Body 3.15 x 1.6 mm", Package Quantity=10, Package Reference=1206.0, Resistance=1K, Temperature Coefficient=100ppm/degreesC, Tolerance=1%, Voltage Rating=200V, Case/Package=1206, Composition=ThickFilm, Contact Plating=Tin, Datasheet URL=http://www.farnell.com/datasheets/1720486.pdf, Datasheet Version=41061.0, Depth=1.6mm, Height=0.55mm, Lead Free=LeadFree, Length=3.2mm, Manufacturer URL=http://www.vishay.com/, Military Standard=Not, Mount=SurfaceMount, Number of Pins=2, Number of Terminations=2, Packaging=TapeandReel, Power Rating=250mW, Radiation Hardening=No, REACH SVHC=Unknown, RoHSCompliant=true, Termination=SMD/SMT, Voltage Rating (DC)=200V, Weight=0.000353oz, Width=0.063inch
R8 R10 R12: library part CMP-2003-04435-1, Manufacturer=Panasonic, Part Number=ERA8AEB202V
R13: library part CMP-03412-036074-1, "RES SMD 220 OHM 5% 1/4W 1206", Manufacturer=Yageo, Package=AC1206, Power Rating=0.25W, Resistance=220Ω, Temperature="-55°C to +155°C", Temperature Range High=+155°C, Temperature Range Low=-55°C, Tolerance=0.05, Voltage Rating=200V, Automotive=Yes, Automotive Grade="Grade 0", Category=Res, ComponentLink2Description=Datasheet, ComponentLink2URL=http://www.yageo.com/NewPortal/yageodocoutput?fileName=/pdf/R-Chip/PYu-AC_51_RoHS_L_6.pdf, Composition="Thick Film", Device Class L1="Passive Components", Device Class L2=Resistors, Device Class L3="Chip SMD Resistors", Digikey Description="RES SMD 220 OHM 5% 1/4W 1206", Footprint Url=http://www.yageo.com/exep/pages/download/literatures/PYu-R_Mount_10.pdf, Height=0.65mm, Ipc Land Pattern Name=RESC310160X55, Lead Free=Yes, Manufacturer Part Number=AC1206JR-07220RL, Mouser Description="Thick Film Resistors - SMD 1/4W 220ohm 5% AEC-Q200", Octopart=https://octopart.com/ac1206jr-07220rl-yageo-30511283, RoHS=TRUE, Series=AC
SW1 SW2: library part CMP-03407-000001-1, "SWITCH TACTILE SPST-NO 0.05A 24V", Contact Current Rating=50mA, Contact Resistance=100mΩ, Manufacturer="TE Connectivity", Operating Force=160gf, Package=0, Temperature="-35°C to +85°C", Temperature Range High=+85°C, Temperature Range Low=-35°C, Automotive=No, Category=Switch, ComponentLink2Description=Datasheet, ComponentLink2URL=https://www.te.com/commerce/DocumentDelivery/DDEController?Action=srchrtrv&DocNm=1825910&DocType=Customer+Drawing&DocLang=English, Device Class L1=Electromechanical, Device Class L2=Switches, Device Class L3="Tactile Switches", Digikey Description="SWITCH TACTILE SPST-NO 0.05A 24V", Electromechanical Life=100000Cycles, Height=17.3mm, Lead Free=Yes, Manufacturer Part Number=3-1825910-1, Mount="Through Hole", Octopart=https://octopart.com/3-1825910-1-te+connectivity-46506874, RoHS=TRUE, Throw Configuration=SPST-NO
SW3 SW4 SW5: library part CMP-08827-000005-1, "SWITCH SLIDE DIP SPST 25MA 24V", Ambient Temperature Range High=+70°C, Ambient Temperature Range Low=-20°C, Contact Current Rating=25mA, Contact Resistance=200mΩ, Manufacturer="Omron Electronics Inc-EMC Div", Package=0, Temperature="-20°C to +70°C", Voltage Rating Dc=24V, Automotive=No, Category=Switch, ComponentLink2Description=Datasheet, ComponentLink2URL=https://omronfs.omron.com/en_US/ecb/products/pdf/en-a6s.pdf, Device Class L1=Electromechanical, Device Class L2=Switches, Device Class L3="DIP Switches", Digikey Description="SWITCH SLIDE DIP SPST 25MA 24V", Electromechanical Life=1000Cycles, Height=3.95mm, Lead Free=Yes, Manufacturer Part Number=A6S-1104-H, Mount="Surface Mount", Mouser Description="DIP Switches / SIP Switches Dip Switch", Number Of Circuits=1, Octopart=https://octopart.com/a6s-1104-h-omron-55410938, RoHS=TRUE, Standoff Height=0mm, Temperature Range High=+70°C, Temperature Range Low=-20°C, Throw Configuration=SPST-NO
U1: library part CMP-0069-00275-3, "SIMPLE SWITCHER® Power Converter 150 KHz 3A Step-Down Voltage Regulator, 5-pin TO-263, Pb-Free", Manufacturer="Texas Instruments", PackageTopMarking="NSUZXYTTE#*LM2596S*-3.3 P+", PowerWise=N, Code_JEDEC=MO-169-AB, ComponentLink1Description="Datasheet URL", ComponentLink1URL=http://www.ti.com/general/docs/lit/getliterature.tsp?genericPartNumber=LM2596&fileType=pdf, CompType=Switcher, PackageDescription="TO-263, Molded, .400 x .390 x .180in, 5 Lead, .067in Pitch, Surface Mount", PackageReference=KTT0005B, PinCount=5, RoHS=Y
U2: library part CMP-0069-01925-3, "SIMPLE SWITCHER® Power Converter 150 KHz 3A Step-Down Voltage Regulator, 5-pin TO-220, Pb-Free", Manufacturer="Texas Instruments", PackageTopMarking="NSUZXYTTE#*LM2596T*-12 P+", PowerWise=N, ComponentLink1Description="Datasheet URL", ComponentLink1URL=http://www.ti.com/general/docs/lit/getliterature.tsp?genericPartNumber=LM2596&fileType=pdf, CompType=Switcher, PackageDescription="TO-220, Molded, Stagger Bend, 5 Lead", PackageReference=NDH0005A, PinCount=5, RoHS=Y
U3: library part CMP-0062-02215-2, "Dual 150mA Ultra Low-Dropout Regulator, 8-pin Mini SOIC, Pb-Free", Manufacturer="National Semiconductor", PackageTopMarking=ZXTT*LCFB, PowerWise=N, Code_JEDEC=MO-187-AA, ComponentLink1Description="LP2966 Datasheet", ComponentLink1URL=http://www.national.com/ds/LP/LP2966.pdf, ComponentLink2Description="LP2966 Web Page", ComponentLink2URL=http://www.national.com/pf/LP/LP2966.html, ComponentLink3Description="MUA08A Package Page", ComponentLink3URL=http://www.national.com/packaging/folders/mua08a.html, CompType="LDO IC", DatasheetVersion=Mar-2005, PackageDescription="MINI SOIC, .118 x .118 x .034in, 8 Lead, .0256in Pitch", PackageReference=MUA08A, PackageVersion="revF, Apr-2008", PinCount=8, RevisionNote="Component URLs added", RoHS=Y
U4: library part CMP-2000-07052-2, "SENSOR HUMI/TEMP 1.8V I2C 3% SMD", Manufacturer=Sensiron, Max Supply Voltage=1.98V, Min Supply Voltage=1.62V, Operating Supply Current=0.7-385uA, Temperature="-40°C to +125°C", Temperature Range High=+125°C, Temperature Range Low=-40°C, Accuracy=3%, Automotive=No, Category=IC, ComponentLink2Description=Datasheet, ComponentLink2URL=https://www.sensirion.com/fileadmin/user_upload/customers/sensirion/Dokumente/0_Datasheets/Humidity/Sensirion_Humidity_Sensors_SHTC1_Datasheet.pdf, Device Class L1=Sensors, Device Class L2="Temperature and Humidity Sensors", Device Class L3=unset, Digikey Description="SENSOR HUMI/TEMP 1.8V I2C 3% SMD", Height=0.75mm, Interface=I2C, Lead Free=Yes, Manufacturer Part Number=SHTC1, Octopart=https://octopart.com/shtc1-sensirion-47736293, Package=SHTC1, Resolution=16bits, RoHS=TRUE

## Via types
v1: diameter 0.45, hole 0.2, Top Layer to Bottom Layer, 58 vias
v2: diameter 4, hole 3.2, Top Layer to Bottom Layer, 4 vias

## Nets (pads, with @x,y where several pads share a name; then routed paths per layer and width w, separated by ;. In a path a pad name is that pad's centre, name@x,y a point inside that pad or via, vN(x,y) a via of type N, cw(c..) or ccw(c..) an arc to the next point about the centre after c; other vN are vias at no path point)
+1.8V: C8.2 C10.1 R12.2 U3.8 U4.1 | length 65.2
  Top Layer w0.381: R12.2 89.32,36.322 C8.2 89.635,36.537 91.821,38.723 v1(91.821,38.735) ; U3.8 98.393,37.17 98.425,37.202 v1(98.425,38.1) 98.425,48.768 96.52,50.673 96.52,51.713 C10.1 99.417,51.84 v1(99.441,51.816) ; v1(108.585,77.47) 108.589,77.466 109.942,77.466 U4.1
  Mid Layer 2 w0.381: v1(91.821,38.735) 97.79,38.735 v1(98.425,38.1) ; v1(99.441,51.816) 99.441,66.294 104.14,70.993 106.807,70.993 108.585,72.771 v1(108.585,77.47)
+12V: C3.2 C5.2 J2.2 R7.2 R9.2 U1.1 U2.1 | length 121
  Top Layer w1.016: U1.1 43.336,54.512 42.418,53.594 42.418,43.434 45.196,40.656 J2.2 46.863,28.845 46.863,39.116 49.149,41.402 59.436,41.402 61.164,43.13 61.164,47.067 C5.2 58.553,47.498 54.993,51.058 R7.2 54.993,54.612 59.944,59.563 C3.2 59.944,63.978 60.436,64.47 65.102,64.47 69.975,69.343 R9.2 75.307,69.343 77.49,67.16 U2.1
+12V_IN: J1.1 J2.1 | length 13
  Top Layer w1.016: J1.1@39.143,38.481 39.143,37.206 43.196,33.153 J2.1
Boot: C1.1 MD1.25 SW2.2 | length 23.7
  Top Layer w0.635: MD1.25 107.632,74.232 109.093,72.771 C1.1@109.093,68.707 ; C1.1 109.069,68.595 109.252,68.412 110.15,68.412 111.125,67.437 111.125,57.857 SW2.2
Button1: MD1.5 P1.3 | length 41.9
  Top Layer w0.381: P1.3 61.468,88.773 62.611,87.63 62.611,80.137 64.516,78.232 79.121,78.232 86.551,85.662 MD1.5
Button2: MD1.4 P2.3 | length 31
  Top Layer w0.381: P2.3 70.12,88.757 71.501,87.376 71.501,80.645 72.644,79.502 78.867,79.502 86.297,86.932 MD1.4
Button3: MD1.6 P3.3 | length 49.7
  Top Layer w0.381: P3.3 52.292,88.678 53.721,87.249 53.721,80.772 57.15,77.343 79.629,77.343 86.678,84.392 MD1.6
Button4: MD1.7 P5.3 | length 57.2
  Top Layer w0.381: P5.3 44.974,88.249 46.228,86.995 46.228,83.439 53.34,76.327 80.01,76.327 86.726,83.043 87.995,83.043 MD1.7
EN: C2.1 MD1.3 SW1.2 | length 11.6
  Top Layer w0.381: C2.1 81.134,91.083 80.13,90.079 80.13,88.909 SW1.2 82.586,88.737 83.185,88.138 88.01,88.138 MD1.3
FB3: C4.2 D6.1 L1.2 LS1.1 MD1.2 P6.19 R1.2 R2.2 R3.2 R4.2 R5.2 R6.2 R8.2 U1.4 | length 219.2
  Top Layer w0.381: U1.4 U1.4@48.436,61.889
  Top Layer w0.635: R8.2 36.02,57.102 v1(36.068,57.15) ; v1(44.196,48.514) v1(44.196,48.514) R6.2 44.195,51.812 v1(47.119,54.735) 48.436,56.053 U1.4 ; v1(63.119,41.402) 68.56,41.402 75.946,34.016 L1.2 75.819,32.639 75.819,29.083 78.613,26.289 99,26.289 102.302,29.591 D6.1 102.752,32.013 104.18,33.441 LS1.1
  Top Layer w1.016: C4.2 33.02,65.534 30.099,68.455 30.099,84.455 37.084,91.44 37.084,95.123 38.481,96.52 42.545,96.52
  Mid Layer 2 w0.635: v1(36.068,57.15) 38.483,54.735 v1(47.119,54.735) ; v1(44.196,48.514) 44.196,47.752 50.546,41.402 v1(63.119,41.402)
  Bottom Layer w0.889: v1(84.836,89.662) 83.439,88.265 83.439,75.184 87.757,70.866 110.985,70.866 111.506,71.387 111.506,73.787 P6.19
FB5: C6.1 C7.2 L2.2 P6.2 R10.2 R11.2 U2.4 U3.1 U3.3 | length 143.1
  Top Layer w0.381: R10.2 37.616,45.212 v1(39.624,45.212) ; v1(48.26,32.893) 48.279,32.893 48.406,32.766 L2.2 ; v1(79.883,28.702) v1(79.883,28.702) R11.2 82.78,29.186 84.05,29.186 87.122,32.258 90.551,32.258 91.694,33.401 91.694,34.925 92.639,35.87 U3.3 95.408,35.87 95.631,36.093 95.631,36.947 95.408,37.17 U3.1 93.541,37.17 92.622,38.089 C7.2 92.622,43.153 v1@93.759,44.29
  Top Layer w0.635: U2.4 72.263,53.467 72.263,50.546 75.057,47.752 82.625,47.752 84.038,49.165 84.538,49.165 C6.1@85.471,50.098 ; C6.1 C6.1@85.471,50.098 ; C7.2 92.495,43.18 90.424,43.18 85.471,48.133 C6.1@85.471,50.098
  Mid Layer 2 w0.381: v1(39.624,45.212) 41.275,43.561 41.275,39.878 v1(48.26,32.893) 48.26,30.861 50.419,28.702 v1(79.883,28.702) ; v1(93.726,44.323) 94.469,45.066 95.777,45.066 104.902,35.941 P6.2
GND: C1.2 C2.2 C3.1 C4.1 C5.1 C6.2 C7.1 C8.1 C10.2 D1.1 D2.2 D3.2 D4.2 D5.2 J1.2 J1.3 MD1.1 MD1.15 MD1.38 MD1.39 P1.1 P1.2 P2.1 P2.2 P3.1 P3.2 P4.3 P5.1 P5.2 P6.1 P6.15 P6.20 Q1.6 SW1.3 SW1.4 SW2.3 SW2.4 SW3.2 SW4.2 SW5.2 U1.3 U1.6 U2.3 U3.4 U3.5 U3.6 U4.4 U4.5 | length 359
  Top Layer w0.381: D1.1 45.554,45.214 45.554,47.948 45.593,47.987 v1(45.593,48.006) ; v1(86.868,29.845) 86.995,29.718 SW5.2 ; v1(87.63,34.798) 87.649,34.798 87.688,34.837 C8.1 ; v1(94.107,33.528) 94.107,35.188 94.139,35.22 U3.4 U3.5 U3.6 ; C7.1 94.488,42.887 v1(94.488,41.656) ; C10.2 96.901,55.094 96.901,59.563 99.314,61.976 99.314,63.119 98.56,63.873 Q1.6 ; U4.5@110.871,77.302 111.031,77.462 U4.4
  Top Layer w0.635: SW3.2 27.559,81.275 v1(27.559,78.613) ; C4.1 32.766,73.438 v1(32.766,77.216) 32.766,80.137 36.878,84.249 P5.1 ; v1(40.386,55.753) 40.386,62.366 40.141,62.611 40.141,69.224 41.656,70.739 U1.6 ; P5.2 P5.1 ; v1(44.704,84.709) 44.244,84.249 P5.1 ; v1(47.371,84.709) 47.402,84.678 P3.1 ; P3.2 P3.1 ; v1(49.911,82.042) 49.784,82.169 P3.1 ; v1(57.15,81.28) 58.039,82.169 P1.1 P1.2 58.071,86.741 v1(61.595,86.741) ; v1(64.008,86.741) 64.024,86.757 P2.2 P2.1 67.818,84.672 v1(67.818,81.407) ; SW1.3@73.331,84.364 SW1.4@79.831,84.364 ; SW1.3 75.81,86.589 75.81,89.018 77.851,91.059 79.375,91.059 79.756,91.44 79.756,92.705 81.134,94.083 C2.2 81.934,94.083 83.439,92.578 v1(83.439,92.075) ; SW1.3@73.504,84.191 73.504,83.584 73.549,83.54 73.549,82.058 73.542,82.051 73.542,80.654 v1(73.533,80.645) ; v1(86.106,92.075) 86.191,92.075 87.524,90.742 MD1.1 ; U4.5@110.871,77.302 110.871,78.867 113.665,81.661 P6.20 ; v1(112.268,33.401) P6.1
  Top Layer w0.762: D4.2 28.926,48.738 30.734,50.546 35.967,50.546 38.257,52.836 D2.2 38.257,53.336 40.386,55.465 v1(40.386,55.753) ; v1(46.736,56.261) U1.3 ; v1(61.341,58.166) 61.595,57.912 C5.1 ; v1(74.041,59.563) 74.041,57.643 U2.3 ; D5.2 v1(86.233,43.053)
  Mid Layer 1 w0.381: v1(45.593,48.006) 45.593,55.118 v1(46.736,56.261) ; v1(86.233,43.053) v1(86.995,43.053) 86.995,42.291 87.122,42.291 ; v1(86.868,29.845) 86.868,29.864 86.995,29.991 86.995,34.925 ; v1(94.107,33.528) 93.345,32.766 88.392,32.766 87.63,33.528 v1(87.63,34.798) 87.617,34.811 87.366,34.811 87.122,35.056 87.122,42.291 ; v1@94.488,41.637 94.475,41.624 94.475,41.392 93.976,40.894 90.043,40.894 v1(87.884,43.053) 87.122,42.291
  Mid Layer 1 w0.635: v1(27.559,78.613) 28.956,77.216 v1(32.766,77.216) ; v1(44.704,84.709) v1(47.371,84.709) ; v1(49.911,82.042) 50.673,81.28 v1(57.15,81.28) ; v1(61.595,86.741) v1(64.008,86.741) ; v1(67.818,81.407) 67.818,80.645 67.849,80.614 73.502,80.614 v1(73.533,80.645) ; v1(83.439,92.075) v1(86.106,92.075) ; v1(94.107,33.528) 94.234,33.401 v1(112.268,33.401)
  Mid Layer 1 w0.762: v1(40.386,55.753) 40.894,56.261 v1(46.736,56.261) 54.229,56.261 56.134,58.166 66.356,58.166 66.802,58.612 66.802,59.563 ; 67.818,80.645 67.818,79.502 66.548,78.232 66.548,73.406 v1(66.802,73.152) 66.802,59.563 ; v1(86.995,43.053) 86.995,45.212 91.44,49.657 v1(91.44,57.785) 89.662,59.563 v1(74.041,59.563) 66.802,59.563
NetD1_2: D1.2 L1.1 U1.2 | length 48.2
  Top Layer w0.381: U1.2 45.036,57.218 45.085,57.169 v1(45.085,57.15) ; v1(48.768,48.387) 49.444,47.711 D1.2 v1(52.705,44.704) ; v1(54.483,39.751) 54.483,33.655 59.436,28.702 63.032,28.702 65.846,31.516 L1.1
  Bottom Layer w0.381: v1(45.085,57.15) 45.085,52.07 v1(48.768,48.387) ; v1(52.705,44.704) 52.705,41.529 v1(54.483,39.751)
NetD2_1: D2.1 R8.1 | length 7.2
  Top Layer w0.381: R8.1 31.877,54.102 32.893,53.086 D2.1
NetD3_1: D3.1 L2.1 U2.2 | length 52.6
  Top Layer w0.381: L2.1 60.676,34.016 63.373,36.713 v1(63.373,38.862) ; v1(67.691,49.657) 67.691,54.229 68.707,55.245 75.438,55.245 75.79,54.893 U2.2 78.486,53.594 80.391,55.499 80.391,68.208 D3.1
  Bottom Layer w0.381: v1(63.373,38.862) 67.691,43.18 v1(67.691,49.657)
NetD4_1: D4.1 R10.1 | length 6.7
  Top Layer w0.381: D4.1 31.526,47.113 31.836,47.423 32.086,47.423 33.026,48.363 R10.1
NetD5_1: D5.1 R12.1 | length 13.5
  Top Layer w0.381: D5.1 72.644,43.023 72.644,41.275 73.914,40.005 78.51,40.005 81.433,37.082 81.633,37.082 82.193,36.522 R12.1
NetD6_2: D6.2 LS1.2 Q1.1 | length 52.7
  Top Layer w0.381: v1(96.139,64.897) 96.139,64.878 96.226,64.791 Q1.1 ; LS1.2 113.919,49.951 v1(113.919,52.705)
  Top Layer w0.762: D6.2 107.315,29.854 107.315,31.75 109.18,33.615 LS1.2
  Bottom Layer w0.381: v1(96.139,64.897) 96.647,65.405 99.949,65.405 106.172,59.182 111.633,59.182 113.919,56.896 v1(113.919,52.705)
NetMD1_16: MD1.16 R13.1 | length 8.1
  Top Layer w0.381: R13.1 90.424,69.723 92.075,71.374 92.075,73.178 MD1.16
NetMD1_23: MD1.23 P6.4 | length 43
  Top Layer w0.508: v1(100.965,69.342) 100.965,73.178 MD1.23
  Bottom Layer w0.508: v1(100.965,69.342) 105.41,64.897 112.649,64.897 114.64,62.906 114.64,43.221 P6.4
NetMD1_27: MD1.27 P6.5 | length 39.2
  Top Layer w0.508: MD1.27 105.138,76.708 106.426,76.708 109.347,73.787 v1(109.982,73.787)
  Mid Layer 2 w0.508: v1(109.982,73.787) 112.141,71.628 112.141,48.26 P6.5
NetMD1_28: MD1.28 P6.6 | length 38.6
  Top Layer w0.508: MD1.28 105.27,77.846 106.558,77.846 109.093,75.311 110.871,75.311 v1(113.157,73.025)
  Mid Layer 2 w0.508: v1(113.157,73.025) 113.157,49.784 P6.6
NetMD1_30: MD1.30 P6.17 | length 15.7
  Top Layer w0.381: MD1.30 105.125,80.531 106.794,80.531 v1(106.807,80.518)
  Mid Layer 2 w0.381: v1(106.807,80.518) 112.395,80.518 113.919,78.994 113.919,76.962 P6.17
NetMD1_33: MD1.33 U4.2 | length 11.4
  Top Layer w0.381: MD1.33 105.265,84.201 106.426,84.201 107.823,82.804 107.823,77.465 108.826,76.462 U4.2 110.015,76.462 U4.2@110.031,76.447
NetMD1_36: MD1.36 U4.3 | length 17.7
  Top Layer w0.381: MD1.36 105.124,88.252 108.953,88.252 v1(108.966,88.265) ; U4.3 111.865,76.462 112.776,77.373 v1(112.776,78.994)
  Bottom Layer w0.381: v1(108.966,88.265) 112.776,84.455 v1(112.776,78.994)
NetP1_4: P1.4 R1.1 | length 4.6
  Top Layer w0.381: R1.1 57.403,91.712 58.039,91.076 P1.4
NetP2_4: P2.4 R2.1 | length 4.4
  Top Layer w0.381: R2.1 67.182,91.781 67.903,91.06 P2.4
NetP3_4: P3.4 R3.1 | length 4.5
  Top Layer w0.381: R3.1 49.022,91.743 49.784,90.981 P3.4
NetP5_4: P5.4 R5.1 | length 4.9
  Top Layer w0.381: R5.1 39.496,91.478 P5.4
NetQ1_2: Q1.2 R13.2 | length 6.1
  Top Layer w0.381: R13.2 94.412,62.662 95.123,63.373 Q1.2
NetR4_1: R4.1 SW1.1 | length 5.1
  Top Layer w0.381: SW1.1 73.458,91.371 75.055,92.968 R4.1
NetR6_1: R6.1 SW2.1 | length 70.5
  Top Layer w0.381: R6.1 v1(49.276,51.562) ; v1(107.061,53.34) 107.061,60.293 SW2.1
  Bottom Layer w0.381: v1(49.276,51.562) 77.27,51.562 79.048,53.34 v1(107.061,53.34)
ON/OFF_1.8V: R11.1 SW5.1 U3.2 | length 25
  Top Layer w0.381: R11.1 84.837,31.751 86.36,33.274 90.424,33.274 90.932,33.782 90.932,35.56 v1@91.885,36.512 ; v1@91.948,36.514 94.16,36.514 U3.2 ; v1(96.647,32.385) 97.16,31.872 SW5.1
  Bottom Layer w0.381: v1(91.948,36.449) 91.948,34.92 94.483,32.385 v1(96.647,32.385)
ON/OFF_3V3: R7.1 SW3.1 U1.5 | length 45.6
  Top Layer w0.381: SW3.1 36.581,81.153 46.101,81.153 53.213,74.041 53.213,61.468 51.934,60.189 U1.5 50.165,60.16 50.165,56.642 51.943,54.864 R7.1
ON/OFF_5V: R9.1 SW4.1 U2.5 | length 13.6
  Top Layer w0.381: U2.5 70.69,60.755 69.342,62.103 SW4.1 72.517,64.003 74.807,66.293 R9.1
RX: MD1.34 P4.1 | length 12
  Top Layer w0.508: MD1.34 105.137,85.725 108.458,85.725 108.966,85.217 P4.1
TX: MD1.35 P4.2 | length 12.2
  Top Layer w0.508: MD1.35 105.138,86.868 112.268,86.868 113.157,87.757 P4.2
pads on no net: MD1.8 MD1.9 MD1.10 MD1.11 MD1.12 MD1.13 MD1.14 MD1.17 MD1.18 MD1.19 MD1.20 MD1.21 MD1.22 MD1.24 MD1.26 MD1.29 MD1.31 MD1.32 MD1.37 P6.3 P6.7 P6.8 P6.9 P6.10 P6.11 P6.12 P6.13 P6.14 P6.16 P6.18 Q1.3 Q1.4 Q1.5 U3.7
copper on no net:
  other v2: 28.321,28.321 116.078,28.448 28.448,95.377 116.078,95.504

## Other copper
Top Layer:
  region net GND: 119.634,82.677 115.57,82.677 115.57,80.772 119.634,80.772
  region net GND: 115.951,91.44 115.951,89.535 118.618,89.535 118.618,69.85 115.824,69.85 115.824,68.072 115.951,67.945 118.491,67.945 118.491,34.29 115.824,34.29 115.824,32.512 119.634,32.512 119.634,91.44
  region net GND: 115.697,90.297 115.697,89.408 118.11,89.408 118.11,91.44 117.856,91.44 104.013,91.44 104.013,90.297
  region net GND: 90.424,72.771 90.424,80.772 93.091,80.772 93.091,85.979 98.171,85.979 99.441,87.249 99.441,91.313 106.045,91.313 106.045,90.297 100.965,90.297 100.584,89.916 100.584,84.328 98.425,84.328 98.425,80.645 98.298,80.518 94.488,80.518 94.488,79.121 94.361,78.994 94.234,79.121 91.694,79.121 91.694,74.676 91.186,74.168 91.186,71.755 90.424,71.755
  region net GND: 79.121,73.914 79.248,73.787 85.979,73.787 85.979,72.517 90.424,72.517 90.424,74.041 90.297,74.168 91.186,74.168 91.186,71.755 79.121,71.755
  region net GND: 84.074,58.928 84.074,55.245 95.631,55.245 95.631,54.229 105.41,54.229 105.41,64.198 105.346,64.262 104.013,64.262 104.013,59.69 102.997,58.928
  region net GND: 105.537,69.596 106.553,69.596 106.553,66.04 105.41,66.04 105.41,62.357 104.013,62.357 104.013,67.31 105.537,67.31